# Altium PCB LIN_break.PcbDoc
Units mm, origin at the board's own origin, x right, y up, seen from the top; angles counter-clockwise.
Board outline 40 x 50 mm, 2 copper layers (Top, Bot); 26 components, 14 nets, 61 pads, 10 vias.
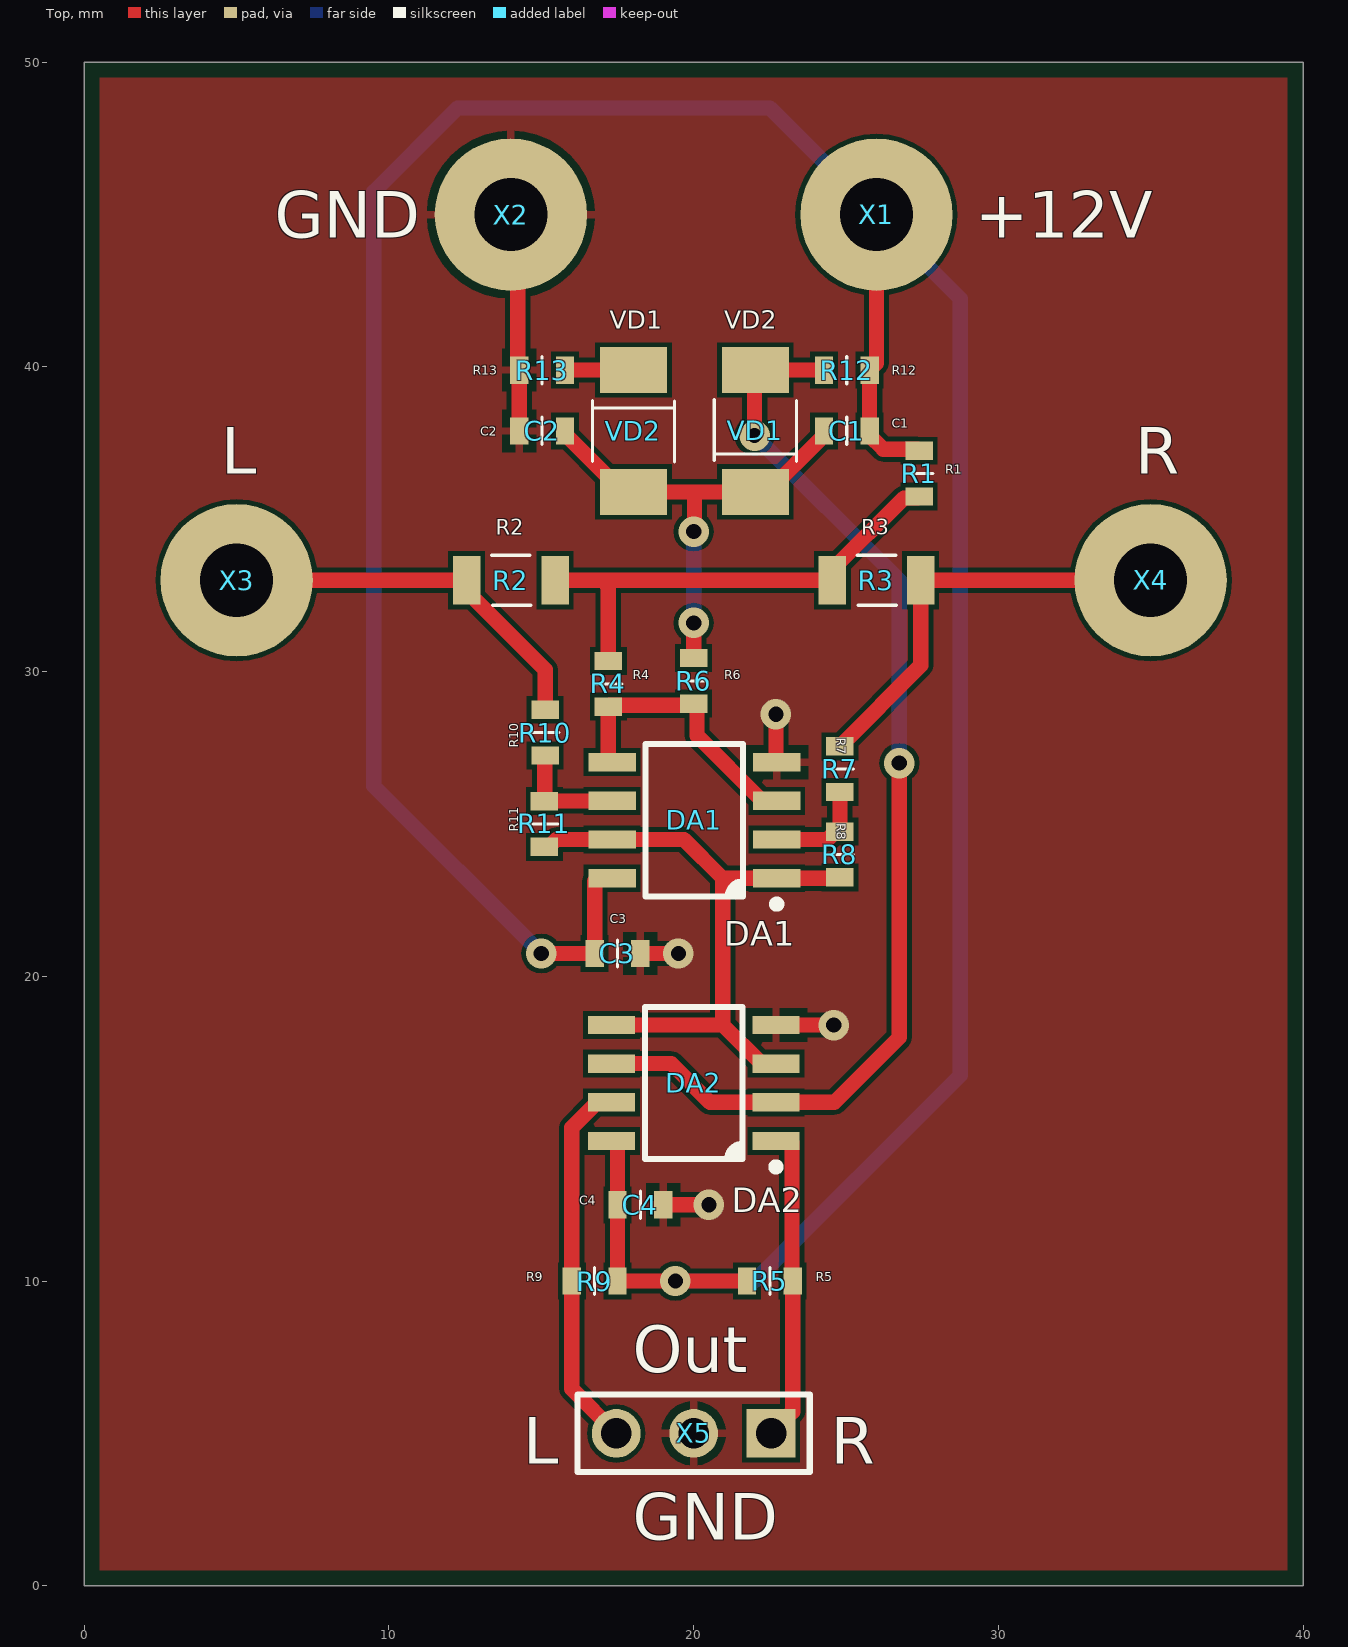
[diagram p0: Top view]
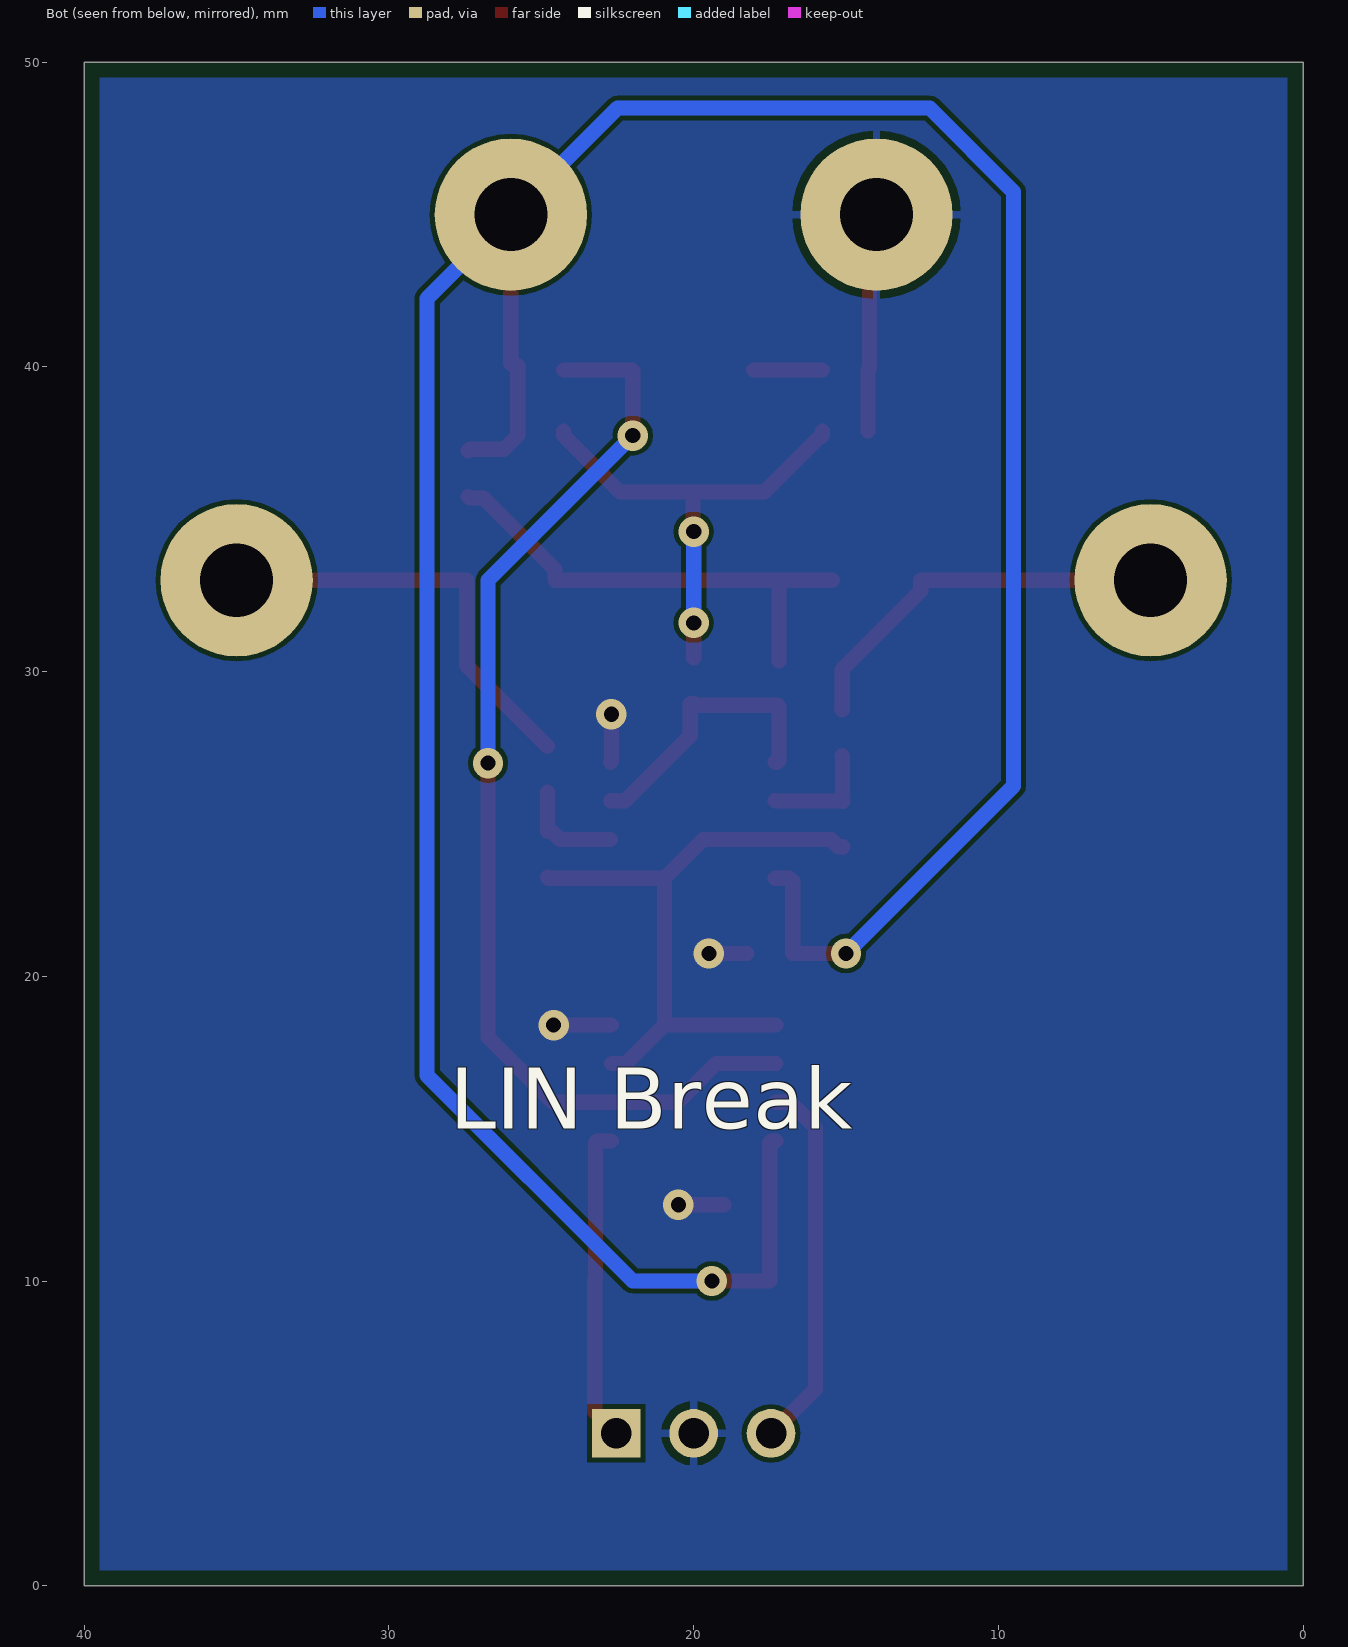
[diagram p1: Bot view, seen from below]
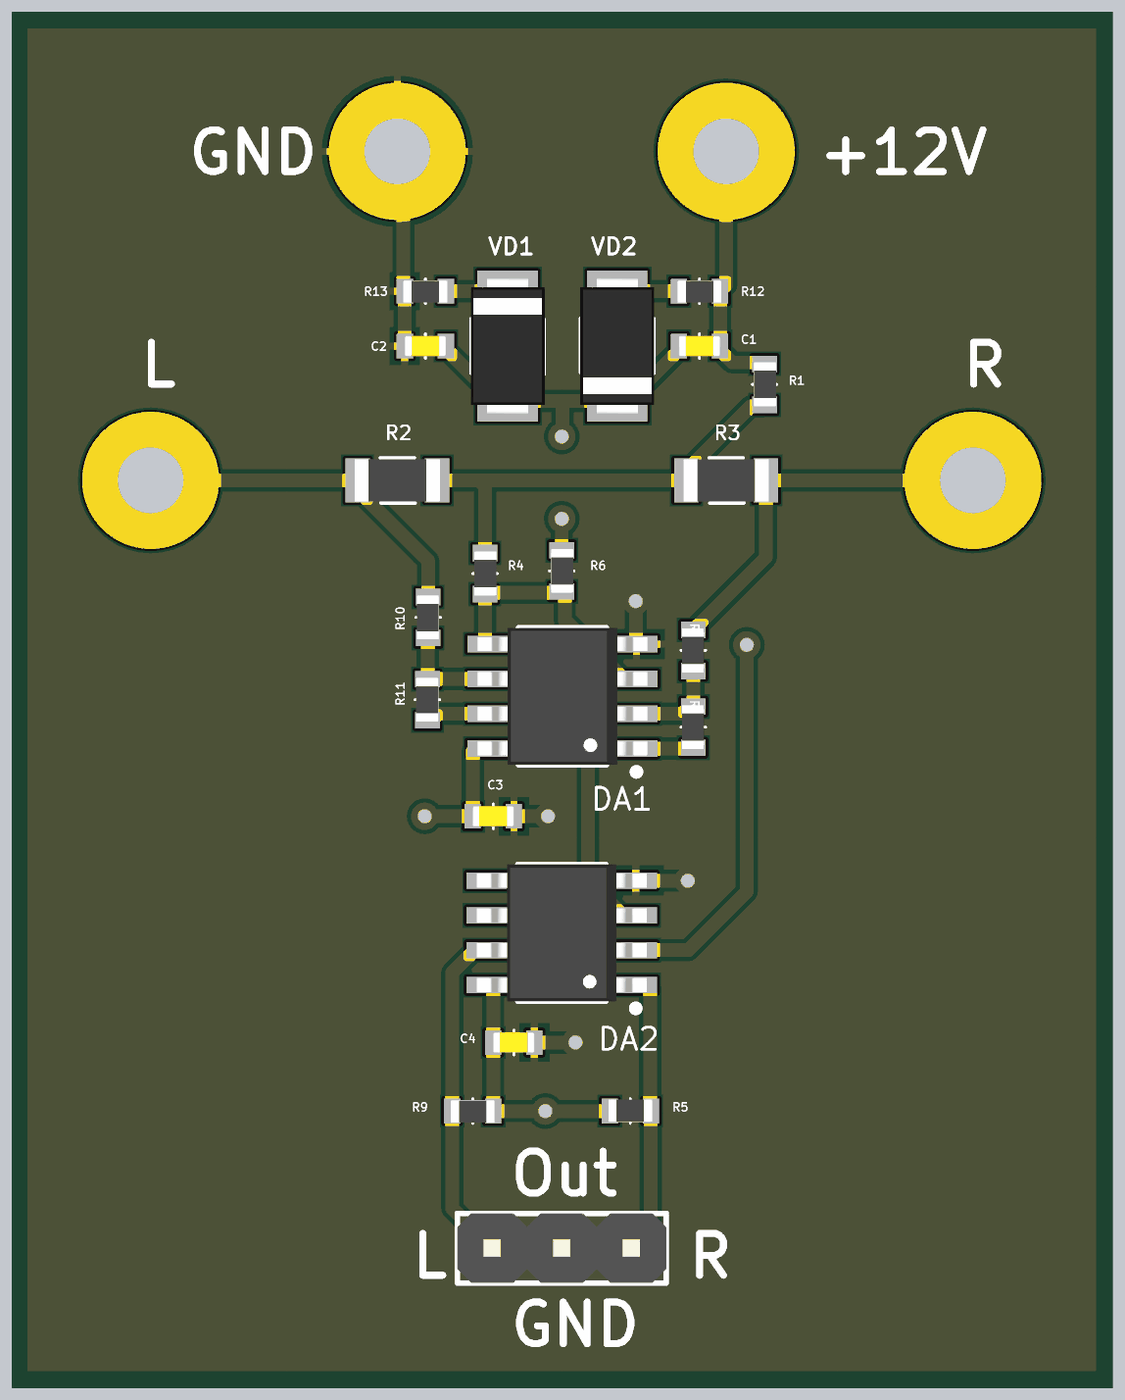
[diagram p2: 3D render of the assembled board from above, using the file's embedded part models]

## Layer stack, top to bottom
Top Solder: solder mask 0.0102, Solder Resist, Dk 3.5
Top: signal copper 0.0356
Dielectric 1: dielectric 0.32, FR-4, Dk 4.8
Bot: signal copper 0.0356
Bottom Solder: solder mask 0.0102, Solder Resist, Dk 3.5

## Board outline
0,0 0,50 40,50 40,0

## Design rules (kind name [scope] priority, off if disabled: settings)
BoardOutlineClearance [All] p1: gap=0.5 ignorepadtopadclearanceinfootprint=FALSE
Clearance ClearanceSilk [OnLayer('Top Silk') vs OnLayer('L1')] p1 off: gap=0.15 ignorepadtopadclearanceinfootprint=FALSE except(0: Arc-Hole Track-Hole SMDPad-Hole THPad-Hole Via-Hole Fill-Hole Poly-Hole Region-Hole Text-Hole)
Clearance Clearance_TOP&BOT_Layers [OnTopLayer Or OnBottomLayer] p2: gap=0.15 ignorepadtopadclearanceinfootprint=FALSE except(0: Arc-Hole Track-Hole SMDPad-Hole THPad-Hole Via-Hole Fill-Hole Poly-Hole Region-Hole Text-Hole)
Clearance Clearance_INT_Layers [(Not OnTopLayer) And (Not OnBottomLayer)] p3: gap=0.15 ignorepadtopadclearanceinfootprint=FALSE except(0: Arc-Hole Track-Hole SMDPad-Hole THPad-Hole Via-Hole Fill-Hole Poly-Hole Region-Hole Text-Hole)
Clearance ClearancePatds [InNet('In')] p4 off: gap=1 ignorepadtopadclearanceinfootprint=FALSE
Clearance [All] p5: gap=0.254 ignorepadtopadclearanceinfootprint=FALSE except(0: Arc-Hole Track-Hole SMDPad-Hole THPad-Hole Via-Hole Fill-Hole Poly-Hole Region-Hole Text-Hole)
HoleSize [All] p1: absolutevalues=TRUE maxlimit=5 minlimit=0.3 maxpercent=80.000 minpercent=20.000
MinimumSolderMaskSliver [All] p1 off: minsoldermaskwidth=0.254
PolygonConnect PolygonConnect_RTC5060185-black [HasFootprint('RTC5060185-black')] p1: connectstyle=Relief reliefconductorwidth=2 reliefentries=4 polygonreliefangle="90 Angle" airgapwidth=0.5
PolygonConnect PolygonConnect_Vias [(ObjectKind = 'Via')] p2: connectstyle=Direct reliefconductorwidth=0.254 reliefentries=4 polygonreliefangle="90 Angle" airgapwidth=0.254
PolygonConnect PolygonConnect_INT_Layers [(Not OnTopLayer) And (Not OnBottomLayer)] p3 off: connectstyle=Relief reliefconductorwidth=0.5 reliefentries=4 polygonreliefangle="90 Angle" airgapwidth=0.2
PolygonConnect PolygonConnect_TOPBOT_Layer [OnTopLayer Or OnBottomLayer] p4 off: connectstyle=Relief reliefconductorwidth=2 reliefentries=4 polygonreliefangle="90 Angle" airgapwidth=0.3
PolygonConnect [All] p5: connectstyle=Relief reliefconductorwidth=0.254 reliefentries=4 polygonreliefangle="90 Angle" airgapwidth=0.254
RoutingVias [All] p1: holewidth=0.5 width=1 viastyle="Through Hole" minholewidth=0.5 minwidth=1 maxholewidth=0.5 maxwidth=1
SilkToSolderMaskClearance [IsPad] p1 off: minsilkscreentomaskgap=0.254 clearancetoexposedcopper=TRUE
SolderMaskExpansion [All] p1: expansion=0.102
UnRoutedNet [All] p1: checkbadconnections=TRUE
Width [All] p1: maxlimit=5 minlimit=0.2 preferedwidth=0.3
26 further rules are at their usual default settings.

## Components (designator, comment, footprint, x,y, rotation, side; value= is the part's Value field where it differs from the comment)
C1 "10u" C0603 25.025,37.9 r180 top
C2 "10u" C0603 15.025,37.9 r180 top
C3 "10u" C0603 17.5,20.75 r0 top
C4 "10u" C0603 18.25,12.5 r0 top
DA1 "LM258" "TI-SOIC8 D" 20.025,25.125 r180 top
DA2 "Comparator" "TI-SOIC8 D" 20,16.5 r180 top value=LM293
R1 "10k" R0603 27.4,36.5 r90 top
R2 "1" R1206 14,33 r0 top
R3 "1" R1206 26,33 r0 top
R4 "100k" R0603 17.2,29.6 r90 top value=1M
R5 "10k" R0603 22.5,10 r180 top
R6 "1M" R0603 20,29.7 r90 top
R7 "100k" R0603 24.8,26.8 r270 top value=1M
R8 "1M" R0603 24.8,24 r270 top
R9 "10k" R0603 16.75,10 r0 top
R10 "100k" R0603 15.125,28 r270 top value=1M
R11 "1M" R0603 15.1,25 r270 top
R12 "10k" R0603 25.025,39.9 r0 top
R13 "10k" R0603 15.025,39.9 r0 top
VD1 "SS14" DO-214AC(SMA) 22.025,37.9 r90 top
VD2 "SS14" DO-214AC(SMA) 18.025,37.9 r270 top
X1 "1-pin_round NB" Hole-2.4-5 26,45 r90 top locked value=Hole-2.4-5
X2 "1-pin_round NB" Hole-2.4-5 14,45 r90 top locked value=Hole-2.4-5
X3 "1-pin_round NB" Hole-2.4-5 5,33 r90 top locked value=Hole-2.4-5
X4 "1-pin_round NB" Hole-2.4-5 35,33 r90 top locked value=Hole-2.4-5
X5 "PLS-3" PLS-3 22.54,5 r180 top locked

## Footprints (in the part's own frame and the unit in brackets; to place one, negate y for a bottom-side part, rotate by r counter-clockwise, add the part's x,y. Pads: shape width x height; smd on the part's side, far side on the other; paste and mask are expansions set on the pad)
C0603 [mm]
  rect 0.6x0.9 smd: 1(-0.75,0) 2(0.75,0)
  silkscreen extent 0,-0.45 0,0.45, body extent -0.76,-0.38 0.76,0.38, height 0.76
DO-214AC(SMA) [mm] "Molded Diode, 2-Leads, Body 4,2x2,7mm, IPC High Density"
  rect 1.5x2.2 smd: 1(-2,0) 2(2,0)
  silkscreen extent -1,-1.35 1.02,1.35, body extent -2.5,-1.35 2.5,1.35, height 2.2
Hole-2.4-5 [mm] "M2 x .4 Screw with Lock Washer"
  round 5 hole 2.4 mask+0.075: 1(0,0)
PLS-3 [mm]
  rect 1.6x1.6 hole 1 paste+1 mask+0.1: 1(0,0)
  round 1.6 hole 1 paste+1 mask+0.1: 2(2.54,0) 3(5.08,0)
  silkscreen extent -1.27,-1.27 6.35,1.27, body extent -1.27,-1.27 6.35,1.27, height 8.54
R0603 [mm] "Chip Resistor, 2-Leads, Body 1.60x0.80mm, IPC Medium Density"
  rect 0.6x0.9 smd: 1(-0.75,0) 2(0.75,0)
  silkscreen extent 0,-0.45 0,0.45, body extent -0.8,-0.42 0.8,0.4, height 0.46
R1206 [mm]
  rect 0.9x1.6 smd: 1(-1.45,0) 2(1.45,0)
  silkscreen extent -0.63,-0.82 0.65,0.82, body extent -1.55,-0.77 1.55,0.78, height 0.55
"TI-SOIC8 D" [mm]
  rect 1.55x0.6 smd: 1(-2.7,1.905) 2(-2.7,0.635) 3(-2.7,-0.635) 4(-2.7,-1.905) 5(2.7,-1.905) 6(2.7,-0.635) 7(2.7,0.635) 8(2.7,1.905)
  silkscreen extent -2.83,-2.5 1.6,2.88, body extent -3.1,-2.5 3.1,2.5, height 1.76

## Part data
C1 C2 C3 C4: library part "C0603 10u 25V X5R 85°C ±20%", "General  ceramic capacitor", Dielectric=X5R, Package=C0603, Part Number=GRM188R61E106MA73#, Temperature=85°C, Tolerance=±20%, Voltage=25V, Alt Part="C1608X5R106MFT(Darfon) C1608X5R1E106M080AC(TDK)", Component Name="C0603 10u 25V X5R 85°C ±20%", HelpURL=https://psearch.en.murata.com/capacitor/result/smd/?pid=GRM188R61E106MA73#, Pins=2, Vendor=Murata
DA1: library part LM258DR, "Op Amp", Package=SOIC8, Component Name=LM258DR, HelpURL=https://www.chipdip.ru/product/lm258d-ti, Part Number=LM258DR, Pins=8, Vendor=TI
DA2: library part LM293D, "Dual Comparator OK", Package=TSSOP8, Component Name=LM293D, HelpURL=https://www.ti.com/lit/ds/symlink/lm293.pdf, Part Number=LM293D, Pins=8, Price=0.1, Vendor=TI
R1 R5 R9 R12 R13: library part "R0603 10k ±1% E24", "Thick Film Chip Resistor - CR Series", Package=R0603, Part Number=CR-03FL7---10k, Power=1/10W, Tolerance=±1%, Voltage=75V, Alt Part="RTT031002FTH (Ralec)", Component Name="R0603 10k ±1% E24", HelpURL=https://www.viking.com.tw/en/search/index.html?f%5Bname_model%5D=CR-03FL7---10k&type=product, Pins=2, Price=0.001, Vendor=Viking
R2 R3: library part "R1206 1 1%", "1/4W 200V", Package=R1206, Part Number=CR-06FL5---1R0, Power=1/4W, Component Name="R1206 1 1%", HelpURL=https://www.viking.com.tw/en/category/Thick-Film-Resistor-CR..A-Series/Resistor-CR-A.html, Pins=2, Price=0.0009, Vendor=Viking
R4 R6 R7 R8 R10 R11: library part "R0603 1M ±1% E24", "Thick Film Chip Resistor - CR Series", Package=R0603, Part Number=CR-03FL7----1M, Power=1/10W, Tolerance=±1%, Voltage=75V, Alt Part="RTT031004FTH (Ralec)", Component Name="R0603 1M ±1% E24", HelpURL=https://www.viking.com.tw/en/search/index.html?f%5Bname_model%5D=CR-03FL7----1M&type=product, Pins=2, Price=0.001, Vendor=Viking
VD1 VD2: "40V 1A Schottky diode", Package=DO-214AC(SMA), Component Name=SS14, HelpURL=http://www.onsemi.com/pub/Collateral/SS19-D.pdf, Part Number=SS14, Pins=2, Price=0.04, Vendor=ON
X1 X2 X3 X4: library part Hole-2.4-5, "M2 x .4 Screw with Lock Washer", Component Name=Hole-2.4-5, Pins=1, Price=0
X5: Component Name=PLS-3, Part Number=PLS-3, Pins=3

## Via types
v1: diameter 1, hole 0.5, Top to Bot, tented both sides, 10 vias

## Nets (pads, with @x,y where several pads share a name; then routed paths per layer and width w, separated by ;. In a path a pad name is that pad's centre, name@x,y a point inside that pad or via, vN(x,y) a via of type N, cw(c..) or ccw(c..) an arc to the next point about the centre after c; other vN are vias at no path point)
+6V: C1.2 C2.1 R6.2 VD1.1 VD2.2 | length 15.8
  Top w0.5: C2.1 15.775,37.75 15.825,37.7 15.875,37.7 17.675,35.9 VD2.2 20.025,35.9 ; R6.2 v1(20,31.6) ; v1(20,34.6) 20.025,34.625 20.025,35.9 ; C1.2 24.275,37.75 22.425,35.9 VD1.1 20.025,35.9
  Bot w0.5: v1(20,31.6) v1(20,34.6)
+12V: C1.1 C3.1 C4.1 DA1.8 DA2.8 R1.2 R5.2 R9.2 R12.2 X1.1 | length 111
  Top w0.5: v1(15,20.75) C3.1 16.75,23.12 16.85,23.22 DA1.8 ; DA2.8 17.45,14.595 17.5,14.545 C4.1 R9.2 v1(19.4,10) R5.2 ; R12.2@25.775,40.05 R12.2 ; X1.1 26,40.125 R12.2 ; R1.2 27.35,37.3 26.225,37.3 25.775,37.75 C1.1 R12.2
  Bot w0.5: v1(15,20.75) 9.5,26.25 9.5,45.75 12.25,48.5 22.5,48.5 X1.1 28.75,42.25 28.75,16.75 22,10 v1(19.4,10)
Current: DA1.1 DA1.7 DA2.3 DA2.5 R8.2 R11.2 | length 21.1
  Top w0.5: R11.2 15.25,24.25 15.49,24.49 DA1.7 19.685,24.49 20.955,23.22 ; DA2.5 20.955,18.405 ; DA2.3 22.225,17.135 20.955,18.405 ; R8.2 24.77,23.22 DA1.1 20.955,23.22 ; 20.955,18.405 20.955,23.22
GND: C2.2 C3.2 C4.2 DA1.4 DA2.4 R13.1 X2.1 X5.2 | length 13.4
  Top w0.5: X2.1 14.225,44.775 14.225,39.95 R13.1 C2.2 ; C3.2 v1(19.5,20.75) ; C4.2 v1(20.5,12.5) ; DA2.4 22.702,18.403 24.597,18.403 v1(24.6,18.4) ; v1(22.7,28.6) 22.7,27.055 DA1.4
L: R2.1 R10.1 X3.1 | length 13
  Top w0.5: X3.1@4.9,33.1 X3.1 R2.1 12.55,32.65 15.125,30.075 R10.1 R10.1@15.138,28.763
L_out: DA2.7 R9.1 X5.3 | length 12.3
  Top w0.5: DA2.7 16.825,15.865 16,15.04 16,6.46 X5.3
M: R1.1 R2.2 R3.1 R4.2 | length 16
  Top w0.5: R2.2 17,33 ; R4.2 17.2,32.8 17,33 ; R1.1 27.35,35.7 26.9,35.7 24.55,33.35 R3.1 17,33
NetDA1_2: DA1.2 R7.2 R8.1 | length 3.5
  Top w0.5: DA1.2 24.39,24.49 24.65,24.75 R8.1 R7.2
NetDA1_3: DA1.3 DA1.5 R4.1 R6.1 | length 9.3
  Top w0.5: DA1.5 17.25,27.03 17.2,27.08 R4.1 17.25,28.9 19.95,28.9 R6.1 ; R6.1@20.1,28.95 20.11,28.94 20.11,27.9 22.25,25.76 DA1.3
NetDA1_6: DA1.6 R10.2 R11.1 | length 3.7
  Top w0.5: R11.1 R11.1@15.105,25.755 ; R10.2 15.113,27.237 15.113,25.763 R11.1@15.105,25.755 ; DA1.6 17.32,25.755 R11.1@15.105,25.755
NetR13_2: R13.2 VD2.1 | length 2.2
  Top w0.5: R13.2 VD2.1
R: R3.2 R7.1 X4.1 | length 14.1
  Top w0.5: R7.1 27.45,30.2 R3.2 X4.1
R_out: DA2.1 R5.1 X5.1 | length 10.4
  Top w0.5: X5.1 23.25,5.71 R5.1 23.225,10.025 23.225,14.545 23.175,14.595 DA2.1
SenceLevel: DA2.2 DA2.6 R12.1 VD1.2 | length 37
  Top w0.5: DA2.6 19.265,17.135 20.535,15.865 DA2.2 24.615,15.865 26.75,18 v1(26.75,27) ; v1(22,37.75) 22,39.875 VD1.2 R12.1
  Bot w0.5: v1(22,37.75) 26.75,33 v1(26.75,27)

## Polygon pours and split planes (outlines as drawn)
GND on Top "Top-GND" (solid, pour order 0): 0,0 40,0 40,50 0,50
GND on Bot "Bot-GND" (solid, pour order 2): 0,0 0,50 40,50 40,0

## Silkscreen, mask and mechanical layers (free items; w line width, h text height)
Top Overlay:
  text "GND" at 6.25,44.25 h1.52
  text "+12V" at 29.25,44.25 h1.52
  text "L" at 4.5,36.5 h1.52
  text "R" at 34.5,36.5 h1.52
  text "Out" at 18,7 h1.52
  text "L" at 14.4,4 h1.52
  text "R" at 24.5,4 h1.52
  text "GND" at 18,1.5 h1.52
Bottom Overlay:
  text "LIN Break" at 28,15 h2
Board:
  lines w0.2: 0.025,0 0.025,50 40,50 40,0 0.025,0